# EAGLE board arduinoven (EAGLE 5.11)
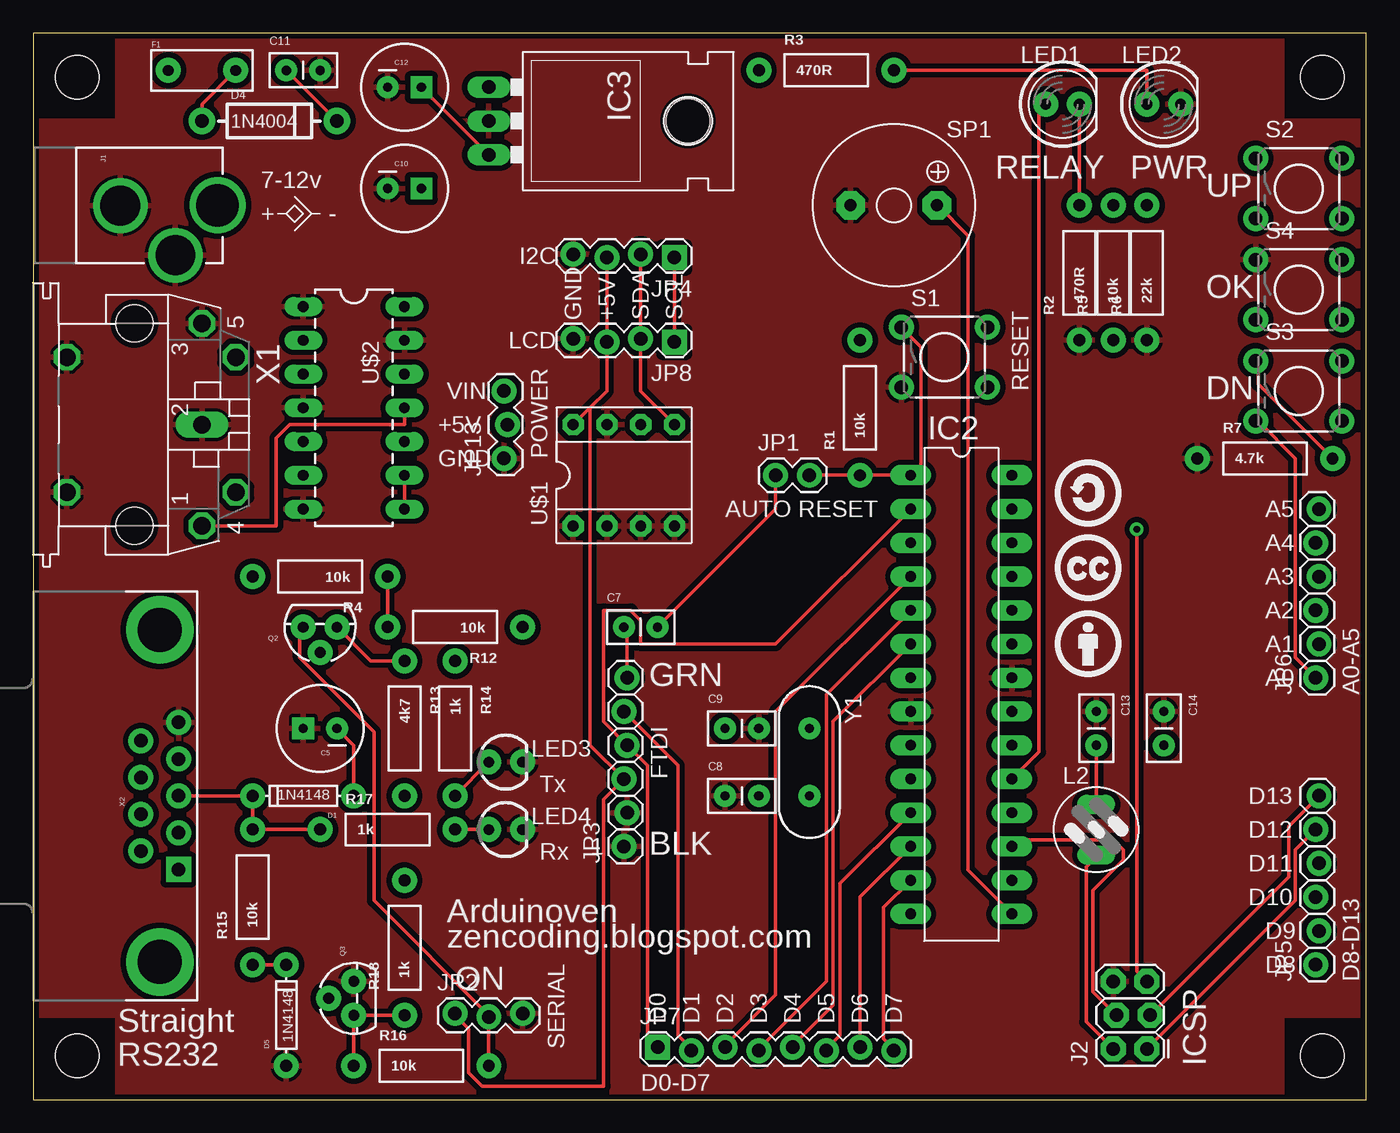
[diagram p0: board, top side]
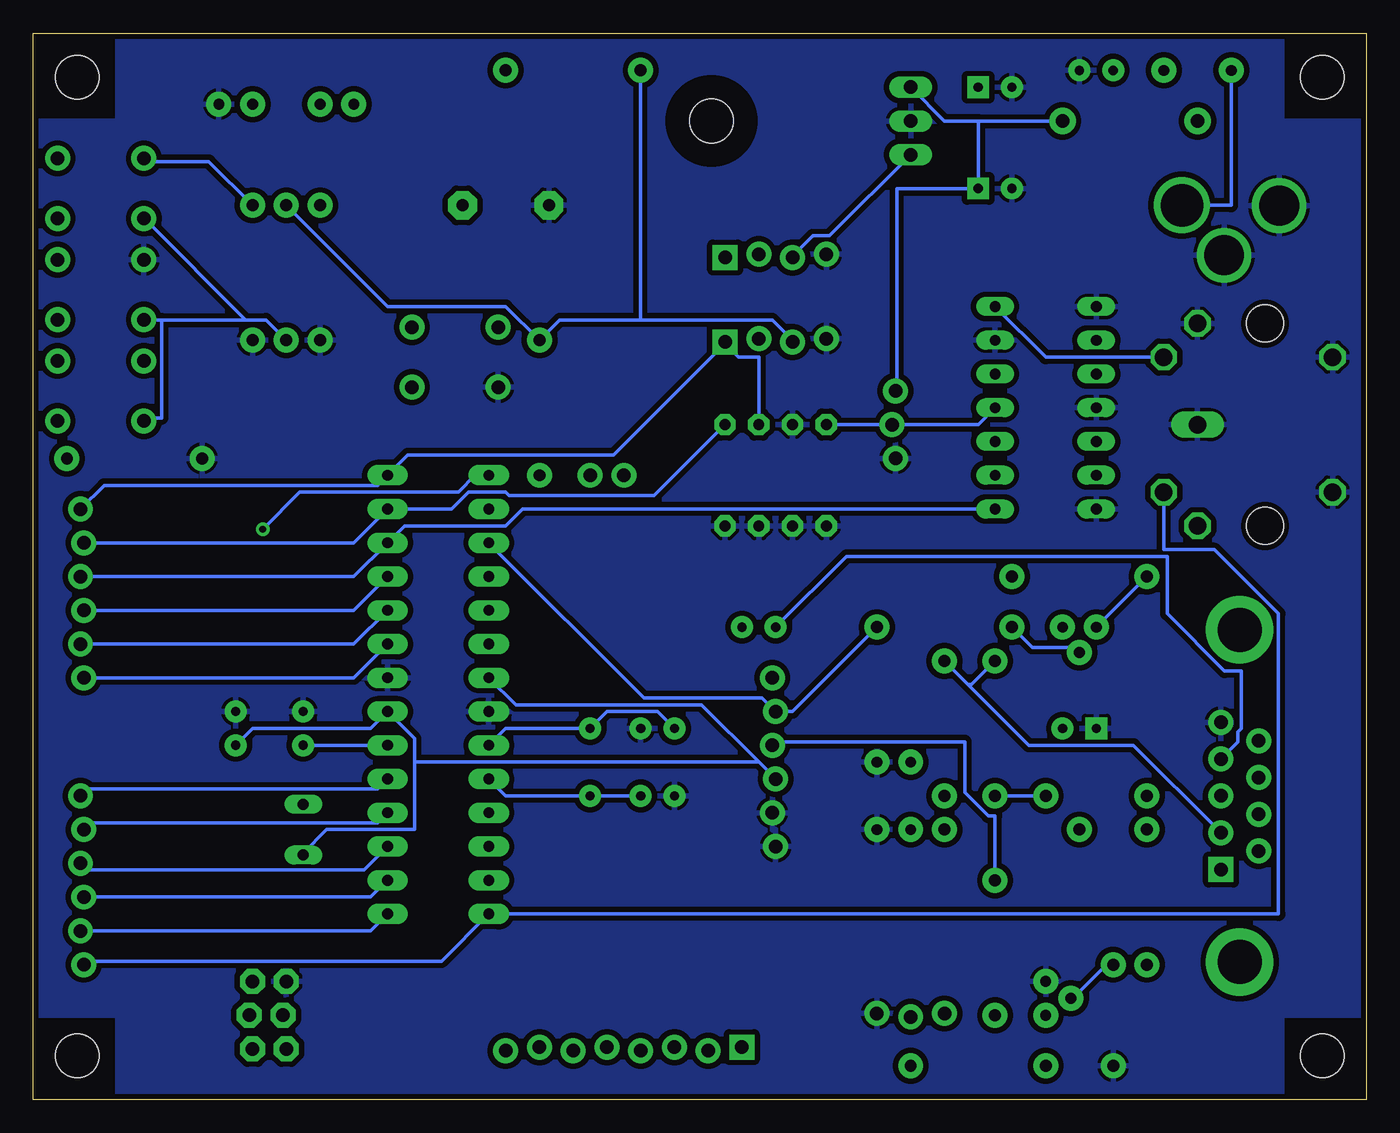
[diagram p1: board, bottom side, seen from below]

Size 100.33 x 80.26 mm. Coordinates in mm from the lower left corner, seen from the top.
Outline: 0,0 100.33,0 100.33,80.26 0,80.26 0,0
Copper layers (1*16): Top 0.035mm / dielectric 1.5mm / Bottom 0.035mm
Design rules "SparkFun *": minimum track width 10mil, minimum drill 20mil, track to track 10mil, track to pad 10mil, pad to pad 10mil, via to via 10mil, smd to smd 8mil, copper to edge 10mil, drill to drill 8mil, minimum pad ring 12mil, minimum via ring 10mil, stop-mask expansion 4mil, vias tented up to drill 25mil, thermal gap 10mil
Net classes: 1 power: width 0.61 mm

## Footprints (pad centres in the part's own frame; a part is rotated, then mirrored left to right if it is on the bottom)
CPOL-RADIAL-100UF-25V = drill 0.7 pad 1.651 square: 1 1.27,0 | drill 0.7 pad 1.651 round: 2 -1.27,0
CAP-PTH-SMALL2 = drill 0.7 pad 1.651 round: 1 0,0; 2 2.54,0
DIODE-1N4148 = drill 0.9 pad 1.88 round: A -3.81,0; C 3.81,0
DIODE-1N4001 = drill 1 pad 1.981 round: A -5.08,0; C 5.08,0
PTC = drill 0.8 pad 1.88 round: P$1 -2.54,0; P$2 2.54,0
ATMEL_DIL28-3 = drill 0.813 pad 1.524 long: 1 -16.51,-3.81; 2 -13.97,-3.81; 3 -11.43,-3.81; 4 -8.89,-3.81; 5 -6.35,-3.81; 6 -3.81,-3.81; 7 -1.27,-3.81; 8 1.27,-3.81; 9 3.81,-3.81; 10 6.35,-3.81; 11 8.89,-3.81; 12 11.43,-3.81; 13 13.97,-3.81; 14 16.51,-3.81; 15 16.51,3.81; 16 13.97,3.81; 17 11.43,3.81; 18 8.89,3.81; 19 6.35,3.81; 20 3.81,3.81; 21 1.27,3.81; 22 -1.27,3.81; 23 -3.81,3.81; 24 -6.35,3.81; 25 -8.89,3.81; 26 -11.43,3.81; 27 -13.97,3.81; 28 -16.51,3.81
TO-220-ALT = drill 1.016 long: GND 0,-3.81; IN -2.54,-3.81; OUT 2.54,-3.81 | hole 3.302: 0,11.176
POWER_JACK_PTH_LOCK = drill 2.997 pad 4.115 round: GND 0.025,6.557; GNDBREAK 3.762,10.7 | drill 3.2 pad 4.115 round: PWR 0,13.878
2X3_LOCK = drill 1.016 pad 1.88 octagon: 1 0,0; 2 0,2.54; 3 2.54,-0.254; 4 2.54,2.286; 5 5.08,0; 6 5.08,2.54
1X02 = drill 1.016 pad 1.88 round: 1 0,0; 2 2.54,0
1X03_LOCK = drill 1.016 pad 1.88 round: 1 0,0.127; 2 2.54,-0.127; 3 5.08,0.127
1X06_LOCK = drill 1.016 pad 1.88 round: 1 0,0; 2 2.54,-0.254; 3 5.08,0; 4 7.62,-0.254; 5 10.16,0; 6 12.7,-0.254
1X04_LOCK = drill 1.016 pad 1.88 square: 1 0,0.127 | drill 1.016 pad 1.88 round: 2 2.54,-0.127; 3 5.08,0.127; 4 7.62,-0.127
1X08_LOCK = drill 1.016 pad 1.88 square: 1 0,0.127 | drill 1.016 pad 1.88 round: 2 2.54,-0.127; 3 5.08,0.127; 4 7.62,-0.127; 5 10.16,0.127; 6 12.7,-0.127; 7 15.24,0.127; 8 17.78,-0.127
STAND-OFF = hole 3.302: 0,0
82114R = drill 0.813 long: 1 0,1.905; 2 0,-1.905
LED5MM = drill 0.813 pad 1.88 round: A -1.27,0; K 1.27,0
LED3MM = drill 0.813 pad 1.88 round: A -1.27,0; K 1.27,0
TO-92 = drill 0.813 pad 1.88 round: 1 -1.27,0; 2 0,1.905; 3 1.27,0
AXIAL-0.4 = drill 0.9 pad 1.88 round: P$1 -5.08,0; P$2 5.08,0
TACTILE-PTH = drill 1.016 pad 1.88 round: 1 -3.251,2.261; 2 3.251,2.261; 3 -3.251,-2.261; 4 3.251,-2.261
KSS1201 = drill 0.914 pad 2.159 octagon: + 3.251,0; - -3.251,0
DIL08 = drill 0.813 pad 1.6 octagon: 1 -3.81,-3.81; 2 -1.27,-3.81; 3 1.27,-3.81; 4 3.81,-3.81; 5 3.81,3.81; 6 1.27,3.81; 7 -1.27,3.81; 8 -3.81,3.81
DIL14 = drill 0.813 long: 1 -8.89,-3.81; 2 -6.35,-3.81; 3 -3.81,-3.81; 4 -1.27,-3.81; 5 1.27,-3.81; 6 3.81,-3.81; 7 6.35,-3.81; 8 6.35,3.81; 9 3.81,3.81; 10 1.27,3.81; 11 -1.27,3.81; 12 -3.81,3.81; 13 -6.35,3.81; 14 -8.89,3.81
DIN-5-PTH = drill 1.321 octagon: 1 7.62,5.08; 3 -7.62,5.08; 4 5.08,7.62; 5 -5.08,7.62; PE -5.08,-5.08; PE@ 5.08,-5.08 | drill 1.321 long: 2 0,5.08 | hole 2.794: 7.62,0; -7.62,0
DB9 = drill 1.016 pad 1.88 square: 1 -5.54,-1.42 | drill 1.016 pad 1.88 round: 2 -2.77,-1.42; 3 0,-1.42; 4 2.77,-1.42; 5 5.54,-1.42; 6 -4.15,1.42; 7 -1.38,1.42; 8 1.38,1.42; 9 4.15,1.42 | drill 3.302 pad 5.08 round: G1 -12.5,0; G2 12.5,0
HC49US = drill 0.7 pad 1.651 round: 1 -2.54,0; 2 2.54,0

## Placement (x,y rotation side)
C5  10u  [CPOL-RADIAL-100UF-25V]  21.59,27.94 180 top
C7  0.1uF  [CAP-PTH-SMALL2]  44.45,35.56 0 top
C8  22pF  [CAP-PTH-SMALL2]  52.07,22.86 0 top
C9  22pF  [CAP-PTH-SMALL2]  52.07,27.94 0 top
C10  100uF  [CPOL-RADIAL-100UF-25V]  27.94,68.58 0 top
C11  0.1uF  [CAP-PTH-SMALL2]  19.05,77.47 0 top
C12  100uF  [CPOL-RADIAL-100UF-25V]  27.94,76.2 0 top
C13  0.1uF  [CAP-PTH-SMALL2]  80.01,29.21 270 top
C14  0.1uF  [CAP-PTH-SMALL2]  85.09,29.21 270 top
D1  1N4148  [DIODE-1N4148]  20.32,22.86 180 top
D4  1N4004  [DIODE-1N4001]  17.78,73.66 0 top
D5  1N4148  [DIODE-1N4148]  19.05,6.35 90 top
F1  500mA  [PTC]  12.7,77.47 0 top
IC2  ATMEGA328p  [ATMEL_DIL28-3]  69.85,30.48 270 top
IC3  7805  [TO-220-ALT]  38.1,73.66 270 top
J1  POWER_JACK  [POWER_JACK_PTH_LOCK]  0,67.31 270 top
J2  ICSP  [2X3_LOCK]  83.82,3.81 90 top
JP1  AUTO RESET  [1X02]  55.88,46.99 0 top
JP2  SERIAL  [1X03_LOCK]  31.75,6.35 0 top
JP3  FTDI  [1X06_LOCK]  44.45,19.05 90 top
JP4  I2C  [1X04_LOCK]  48.26,63.5 180 top
JP5  D8-D13  [1X06_LOCK]  96.52,10.16 90 top
JP6  A0-A5  [1X06_LOCK]  96.52,31.75 90 top
JP7  D0-D7  [1X08_LOCK]  46.99,3.81 0 top
JP8  LCD  [1X04_LOCK]  48.26,57.15 180 top
JP9  STAND-OFF  [STAND-OFF]  3.3,3.3 0 top
JP10  STAND-OFF  [STAND-OFF]  3.3,76.96 0 top
JP11  STAND-OFF  [STAND-OFF]  97.03,3.3 0 top
JP12  STAND-OFF  [STAND-OFF]  97.03,76.96 0 top
JP13  [1X03_LOCK]  35.56,48.26 90 top
L2  100uH  [82114R]  80.01,20.32 0 top
LED1  RELAY  [LED5MM]  77.47,74.93 0 top
LED2  PWR  [LED5MM]  85.09,74.93 0 top
LED3  Tx  [LED3MM]  35.56,25.4 0 top
LED4  Rx  [LED3MM]  35.56,20.32 0 top
Q2  BC557  [TO-92]  21.59,35.56 180 top
Q3  BC547  [TO-92]  24.13,7.62 90 top
R1  10k  [AXIAL-0.4]  62.23,52.07 90 top
R2  470R  [AXIAL-0.4]  78.74,62.23 90 top
R3  470R  [AXIAL-0.4]  59.69,77.47 0 top
R4  10k  [AXIAL-0.4]  21.59,39.37 180 top
R5  10k  [AXIAL-0.4]  81.28,62.23 90 top
R6  22k  [AXIAL-0.4]  83.82,62.23 90 top
R7  4.7k  [AXIAL-0.4]  92.71,48.26 0 top
R12  10k  [AXIAL-0.4]  31.75,35.56 180 top
R13  4k7  [AXIAL-0.4]  27.94,27.94 270 top
R14  1k  [AXIAL-0.4]  31.75,27.94 270 top
R15  10k  [AXIAL-0.4]  16.51,15.24 90 top
R16  10k  [AXIAL-0.4]  29.21,2.54 0 top
R17  1k  [AXIAL-0.4]  26.67,20.32 0 top
R18  1k  [AXIAL-0.4]  27.94,11.43 90 top
S1  RESET  [TACTILE-PTH]  68.58,55.88 0 top
S2  UP  [TACTILE-PTH]  95.25,68.58 0 top
S3  DOWN  [TACTILE-PTH]  95.25,53.34 0 top
S4  ENTER  [TACTILE-PTH]  95.25,60.96 0 top
SP1  PIEZO  [KSS1201]  64.77,67.31 0 top
U$1  24LC256  [DIL08]  44.45,46.99 0 top
U$2  AD595  [DIL14]  24.13,50.8 270 top
U$3  PIN_POSITIVE  [SYMBOL_PIN_POSITIVE]  19.68,66.67 0 top
U$4  [BY]  76.83,31.75 0 top
U$5  [CC]  76.83,37.47 0 top
U$6  [SA]  76.83,43.18 0 top
X1  DIN-5-FEMALE  [DIN-5-PTH]  7.62,50.8 270 top
X2  DB9-Female  [DB9]  9.53,22.86 90 top
Y1  16MHz  [HC49US]  58.42,25.4 270 top

## Library data of the parts
C5 C7-C14 D1 D4 D5 F1 IC3 J1 JP1-JP13 LED1-LED4 R1-R7 R12-R18 S1-S4 X2 Y1 = SparkFun
IC2 J2 L2 Q2 Q3 U$1-U$6 = zencoding
SP1 = buzzer; OC_FARNELL: unknown; OC_NEWARK: unknown
X1 = zencoding; JAYCAR: PS0350; SPARKFUN: PRT-09536

## Nets
ADC0/PC0: IC2.23 JP6.1 R5.P$1 S2.3 S3.3 S4.3
ADC1/PC1: IC2.24 JP6.2
ADC2/PC2: IC2.25 JP6.3
ADC3/PC3: IC2.26 JP6.4 U$2.8 U$2.9
AIN0/PD6: IC2.12 JP7.7
AIN1/PD7: IC2.13 JP7.8
GND: C5.1 C8.1 C9.2 C10.2 C11.2 C12.2 C13.1 C14.1 D5.A IC2.8 IC2.22 IC3.GND J1.GND J1.GNDBREAK J2.6 JP2.3 JP3.1 JP3.2 JP4.4 JP8.4 JP13.1 LED2.K LED3.K LED4.K Q3.3 R2.P$1 R6.P$1 R7.P$1 S1.3 S4.1 SP1.- U$1.1 U$1.2 U$1.3 U$1.4 U$1.7 U$2.1 U$2.4 U$2.7 U$2.13 X1.2 X1.3 X1.PE X1.PE@ X2.5
I2C/SCL: IC2.28 JP4.1 JP6.6 JP8.1 U$1.6
I2C/SDA: IC2.27 JP4.2 JP6.5 JP8.2 U$1.5
ICP/PB0: IC2.14 JP5.1 X1.4
INT0/PD2: IC2.4 JP7.3
INT1/PD3: IC2.5 JP7.4
M8RESET: C7.1 JP3.6 X2.4
M8RXD: IC2.2 JP3.4 JP7.1 R18.P$2
M8TXD: IC2.3 JP3.5 JP7.2 R12.P$1
MISO/PB4: IC2.18 J2.1 JP5.5
MOSI/PB3: IC2.17 J2.4 JP5.4
N$1: LED1.K R2.P$2
N$2: IC2.1 J2.5 JP1.2 R1.P$1 S1.1
N$3: Q2.1 R13.P$1 R14.P$1 X2.2
N$5: LED2.A R3.P$2
N$6: R6.P$2 S2.1
N$7: R7.P$2 S3.1
N$8: C5.2 D1.A R13.P$2
N$9: F1.P$1 J1.PWR
N$10: D4.A F1.P$2
N$12: Q2.2 R4.P$1 R12.P$2
N$13: LED3.A R14.P$2
N$14: D1.C R15.P$2 R17.P$1 X2.3
N$15: JP2.2 Q2.3 R4.P$2 R16.P$2
N$16: Q3.1 R16.P$1 R18.P$1
N$17: LED4.A R17.P$2
N$18: D5.C Q3.2 R15.P$1
N$19: C7.2 JP1.1
N$20: C8.2 IC2.10 Y1.2
N$21: C9.1 IC2.9 Y1.1
N$23: C13.2 IC2.20 L2.1
OC1/PB1: IC2.15 JP5.2 SP1.+
SCK/PB5: IC2.19 J2.3 JP5.6 LED1.A
SS/PB2: IC2.16 JP5.3
T0/PD4: IC2.6 JP7.5
T1/PD5: IC2.11 JP7.6
TC/-IN: U$2.14 X1.5
VCC: C12.1 C14.2 IC2.7 IC2.21 IC3.OUT J2.2 JP2.1 JP3.3 JP4.3 JP8.3 JP13.2 L2.2 R1.P$2 R3.P$1 R5.P$2 U$1.8 U$2.11 X1.1
VIN: C10.1 C11.1 D4.C IC3.IN JP13.3

## Tracks (layer width: path | path; a pad name or v marks a point on that pad's centre or on a via)
ADC0/PC0
  Top 0.254: JP6.1 95,33.27 95,48.26 92.2,51.05 S3.3
  Bottom 0.254: IC2.23 76.2,31.75 JP6.1 | R5.P$1 82.8,58.67 84.33,58.67 | 90.68,58.67 91.95,58.67 S4.3 | 90.68,58.67 84.33,58.67 | 84.33,58.67 91.95,66.29 S2.3 | 90.68,58.67 90.68,51.31 91.95,51.31 S3.3
ADC1/PC1
  Bottom 0.254: IC2.24 76.2,34.29 JP6.2
ADC2/PC2
  Bottom 0.254: IC2.25 76.2,36.83 JP6.3
ADC3/PC3
  Top 0.254: U$2.8 U$2.9
  Bottom 0.254: JP6.4 76.2,39.37 IC2.26 72.39,43.18 64.77,43.18 63.5,44.45 U$2.8
AIN0/PD6
  Top 0.254: IC2.12 62.23,15.24 JP7.7
AIN1/PD7
  Top 0.254: IC2.13 64.01,14.48 64.01,4.57 64.77,3.81 JP7.8
GND
  pour Bottom (isolate 0.406): 0,73.66 6.35,73.66 6.35,80.01 93.98,80.01 93.98,73.66 100.33,73.66 100.33,6.35 93.98,6.35 93.98,0 6.35,0 6.35,6.35 0,6.35
  pour Top (isolate 0.406): 0,73.66 6.35,73.66 6.35,80.01 93.98,80.01 93.98,73.66 100.33,73.66 100.33,6.35 93.98,6.35 93.98,0 6.35,0 6.35,6.35 0,6.35
I2C/SCL
  Top 0.254: JP8.1 JP4.1
  Bottom 0.254: U$1.6 45.72,55.88 47.24,55.88 48.26,56.9 | JP6.6 95,46.23 74.42,46.23 IC2.28 72.14,48.51 56.64,48.51 48.26,56.9 | 48.26,56.9 JP8.1
I2C/SDA
  Top 0.254: U$1.5 45.72,53.34 JP8.2 JP4.2
  Bottom 0.254: JP6.5 76.2,41.91 IC2.27 68.83,44.45 67.56,45.72 64.77,45.72 64.52,45.47 53.59,45.47 U$1.5
ICP/PB0
  Bottom 0.254: JP5.1 96.27,10.41 69.6,10.41 IC2.14 6.6,13.97 6.6,36.58 11.43,41.4 15.24,41.4 X1.4
INT0/PD2
  Top 0.254: IC2.4 55.88,29.21 55.88,7.87 52.07,4.06 JP7.3
INT1/PD3
  Top 0.254: IC2.5 59.69,30.48 59.69,8.89 54.61,3.81 JP7.4
M8RESET
  Top 0.254: C7.1 44.7,35.31 JP3.6
  Bottom 0.254: C7.1 39.12,40.89 14.99,40.89 14.99,36.58 10.67,32.26 9.4,32.26 9.4,27.94 9.65,27.69 9.65,26.92 10.92,25.65 X2.4
M8RXD
  Top 0.254: IC2.2 55.88,34.29 45.72,34.29 45.72,36.07 44.96,36.83 42.93,36.83 42.93,28.45 JP3.4 46.23,25.15 46.23,4.83 46.99,4.06 JP7.1
  Bottom 0.254: R18.P$2 27.94,21.34 28.45,21.34 30.23,23.11 30.23,26.92 44.45,26.92 JP3.4
M8TXD
  Top 0.254: JP3.5 48.51,25.15 48.51,4.83 49.53,3.81 JP7.2
  Bottom 0.254: IC2.3 54.36,30.23 45.47,30.23 JP3.5 43.18,29.21 R12.P$1
MISO/PB4
  Top 0.254: J2.1 95,14.99 95,18.8 JP5.5
  Bottom 0.254: IC2.18 74.42,20.83 96.01,20.83 JP5.5
MOSI/PB3
  Top 0.254: J2.4 79.76,8.13 79.76,15.75 82.04,18.03 82.04,18.8 81.28,19.56 73.66,19.56 IC2.17
  Bottom 0.254: IC2.17 75.44,17.27 96.27,17.27 JP5.4
N$1
  Top 0.254: R2.P$2 LED1.K
N$2  (via drill 0.51)
  Top 0.254: J2.5 83.06,9.65 v83.06,42.93 | JP1.2 R1.P$1 IC2.1 66.8,47.75 66.8,56.64 65.53,57.91 S1.1
  Bottom 0.254: v83.06,42.93 80.26,45.72 68.33,45.72 67.06,46.99 IC2.1
N$3
  Top 0.254: Q2.1 25.4,33.02 R13.P$1
  Bottom 0.254: 29.97,31.24 R14.P$1 | 29.97,31.24 25.4,26.67 17.53,26.67 11.18,20.32 X2.2 | R13.P$1 29.72,31.24 29.97,31.24
N$5
  Top 0.254: R3.P$2 83.82,77.47 LED2.A
N$6
  Bottom 0.254: R6.P$2 87.12,70.61 91.95,70.61 S2.1
N$7
  Top 0.254: R7.P$2 92.2,53.85 92.2,55.37 S3.1
N$8
  Top 0.254: C5.2 24.13,26.67 D1.A
  Bottom 0.254: D1.A R13.P$2
N$9
  Bottom 0.254: F1.P$1 10.16,67.31 J1.PWR
N$10
  Top 0.254: F1.P$2 12.7,74.93 D4.A
N$12
  Top 0.254: R12.P$2 R4.P$1
  Bottom 0.254: R12.P$2 25.15,34.04 21.84,34.04 21.59,33.78 Q2.2
N$13
  Top 0.254: R14.P$2 LED3.A
N$14
  Top 0.254: R17.P$1 R15.P$2 D1.C X2.3
N$15
  Top 0.254: R16.P$2 JP2.2 34.29,6.35 25.65,14.99 25.65,27.69 20.07,33.27 20.07,35.31 Q2.3
  Bottom 0.254: Q2.3 R4.P$2
N$16
  Top 0.254: R16.P$1 Q3.1 R18.P$1
N$17
  Top 0.254: R17.P$2 LED4.A
N$18
  Top 0.254: R15.P$1 D5.C
  Bottom 0.254: D5.C 19.56,10.16 22.1,7.62 Q3.2
N$19
  Top 0.254: C7.2 55.88,44.45 JP1.1
N$20
  Bottom 0.254: IC2.10 64.77,22.86 Y1.2 C8.2
N$21
  Bottom 0.254: IC2.9 64.77,27.94 Y1.1 57.15,29.21 53.34,29.21 C9.1
N$23
  Top 0.254: C13.2 L2.1
  Bottom 0.254: IC2.20 C13.2
OC1/PB1
  Top 0.254: IC2.15 70.36,17.27 70.36,65.02 68.07,67.31 SP1.+
  Bottom 0.254: IC2.15 74.93,12.7 JP5.2
SCK/PB5
  Top 0.254: J2.3 94.49,16.76 94.49,20.57 JP5.6 | LED1.A 75.69,74.42 75.69,26.16 IC2.19
  Bottom 0.254: IC2.19 74.42,23.37 96.27,23.37 JP5.6
SS/PB2
  Bottom 0.254: IC2.16 74.93,15.24 JP5.3
T0/PD4
  Top 0.254: IC2.6 60.2,28.45 60.2,7.11 57.15,4.06 JP7.5
T1/PD5
  Top 0.254: IC2.11 60.71,16.26 60.71,4.83 59.69,3.81 JP7.6
TC/-IN
  Bottom 0.254: U$2.14 24.13,55.88 X1.5
VCC
  Top 0.254: J2.2 79.25,5.84 79.25,17.53 80.01,18.29 L2.2 | JP2.1 31.75,6.35 32.77,5.33 32.77,2.03 33.78,1.02 42.93,1.02 42.93,22.61 JP3.3 41.91,26.67 41.91,52.07 | X1.1 18.29,43.18 18.29,49.78 19.3,50.8 27.94,50.8 U$2.11 | JP4.3 JP8.3 43.18,53.34 41.91,52.07 | 41.91,52.07 U$1.8 | IC3.OUT C12.1
  Bottom 0.254: C14.2 83.82,27.94 74.93,27.94 IC2.21 71.63,27.18 71.63,25.4 | 71.63,25.4 71.63,20.32 78.23,20.32 80.01,18.54 L2.2 | IC2.7 64.01,29.72 50.04,29.72 45.72,25.4 | JP3.3 45.72,25.4 | 45.72,25.4 71.63,25.4 | U$2.11 29.21,50.8 JP13.2 | U$1.8 JP13.2 | 54.61,58.67 44.7,58.67 43.18,57.15 JP8.3 | 54.61,58.67 60.71,58.67 R1.P$2 64.77,59.69 73.66,59.69 R5.P$2 | 54.61,58.67 R3.P$1 | IC3.OUT 40.39,65.02 41.66,65.02 43.18,63.5 JP4.3 | JP13.2 34.54,50.8
VIN
  Top 0.254: D4.C C11.1
  Bottom 0.254: IC3.IN 31.75,73.66 29.21,73.66 | 29.21,73.66 D4.C | 29.21,73.66 C10.1 35.31,68.58 35.31,53.34 JP13.3

## Text on the board
tPlace: 7-12v | UP | OK | GND | +5V | SDA | SCL | VIN | RESET | DN | +5V | GND | POWER | A5 | A4 | A3 | A2 | A1 | GRN | A0 | D13 | D12 | 1 | BLK | D11 | D10 | Arduinoven | D9 | zencoding.blogspot.com | D8 | ON | D0 | D1 | D2 | D3 | D4 | D5 | D6 | D7 | Straight | RS232